# Altium PCB Face PCB.PcbDoc
Units mil, origin at the board's own origin, x right, y up, seen from the top; angles counter-clockwise.
Board outline 2000 x 2000 mil, 2 copper layers (Top Layer, Bottom Layer); 25 components, 23 nets, 94 pads, 6 vias.
Unrouted connection lines stored in the file: 1.
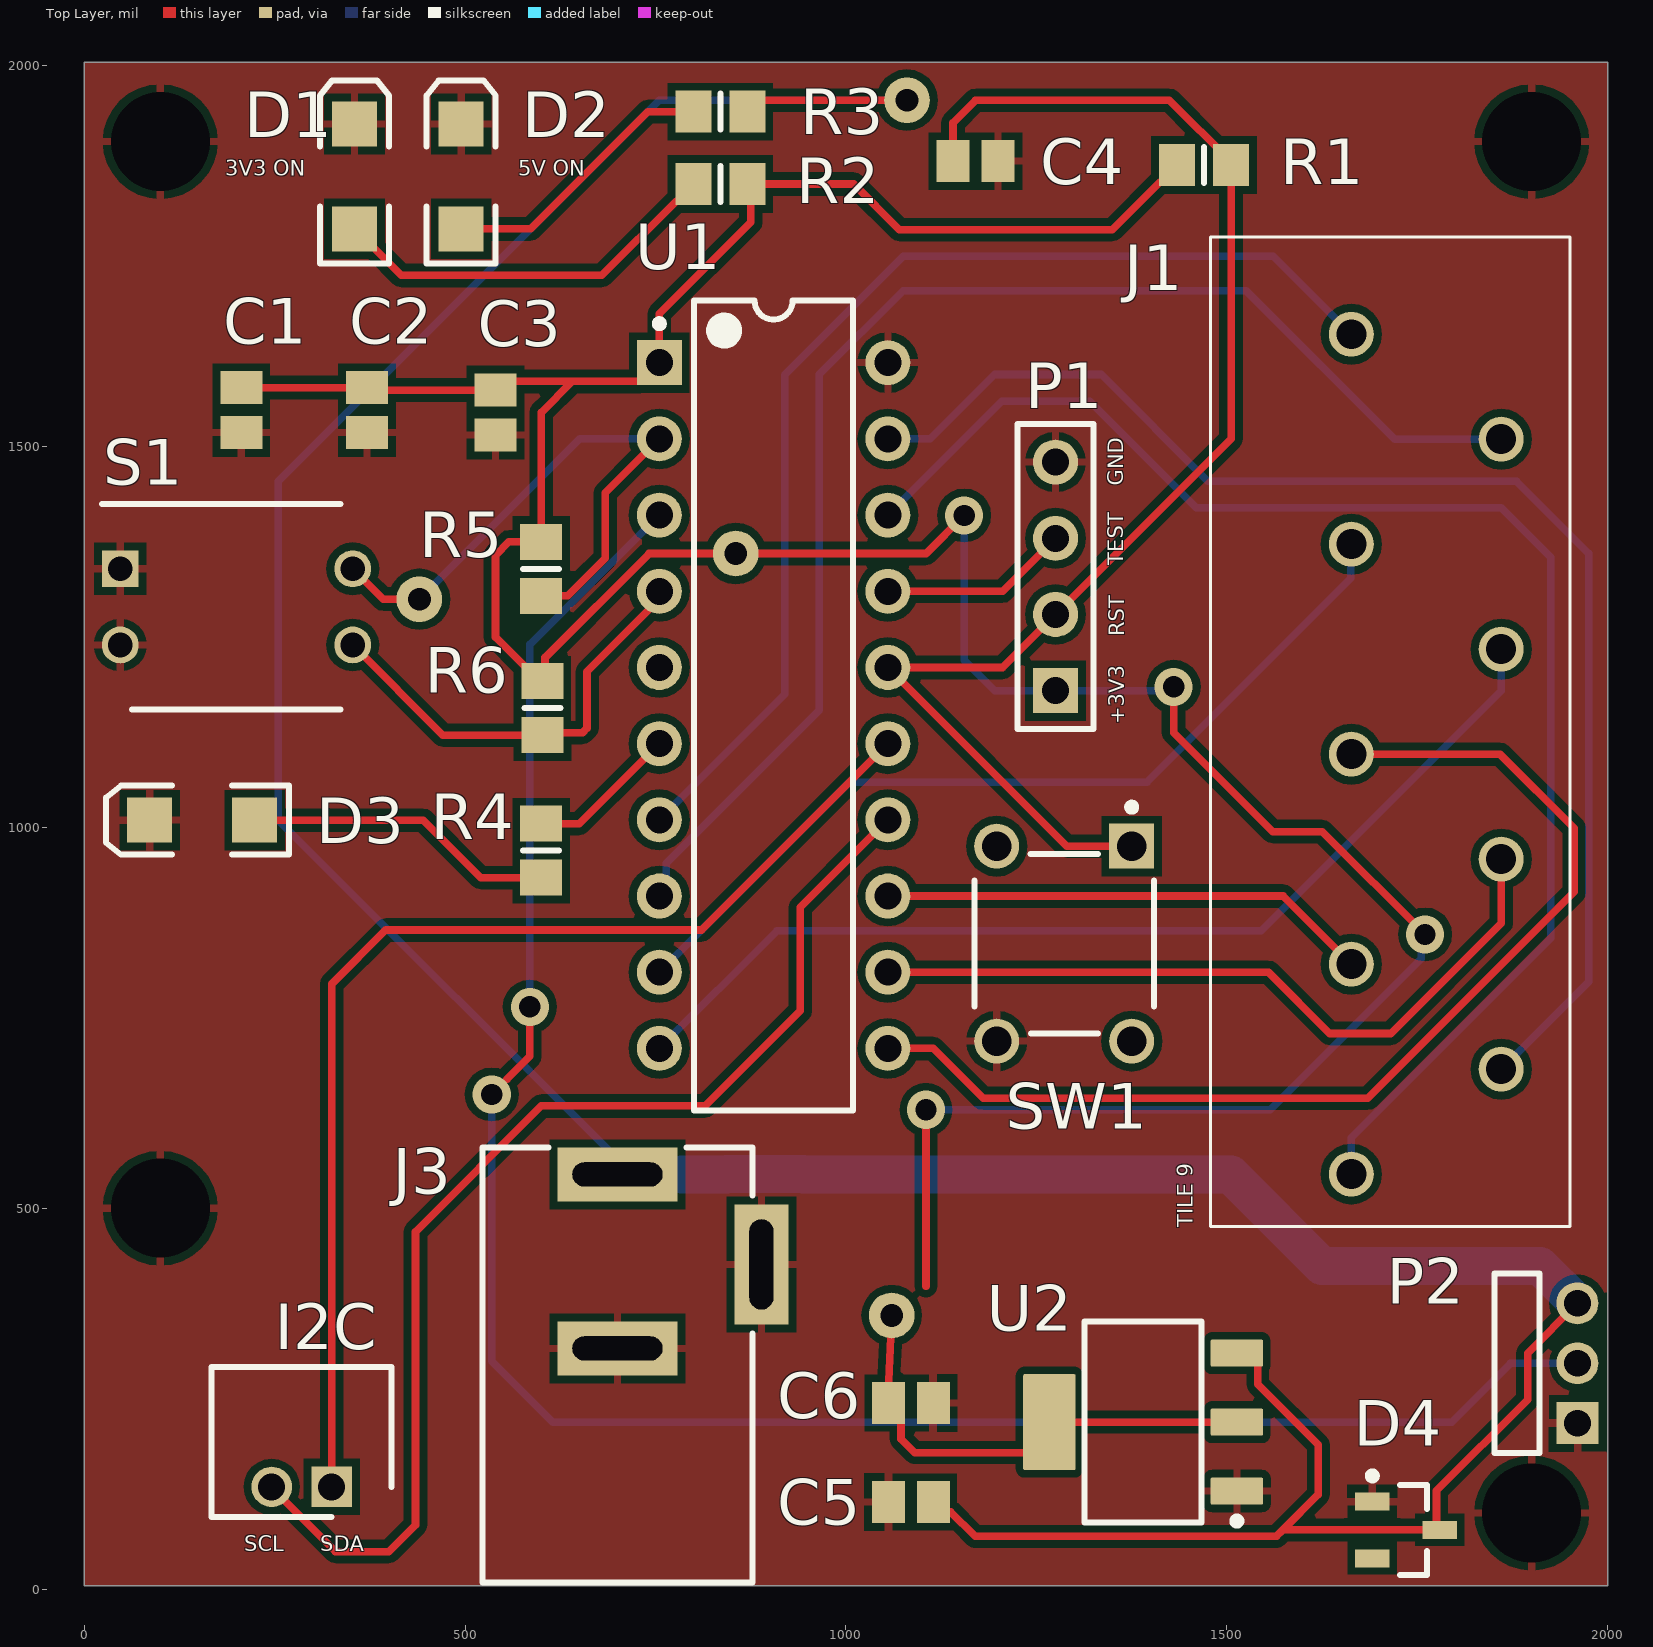
[diagram p0: Top Layer view]
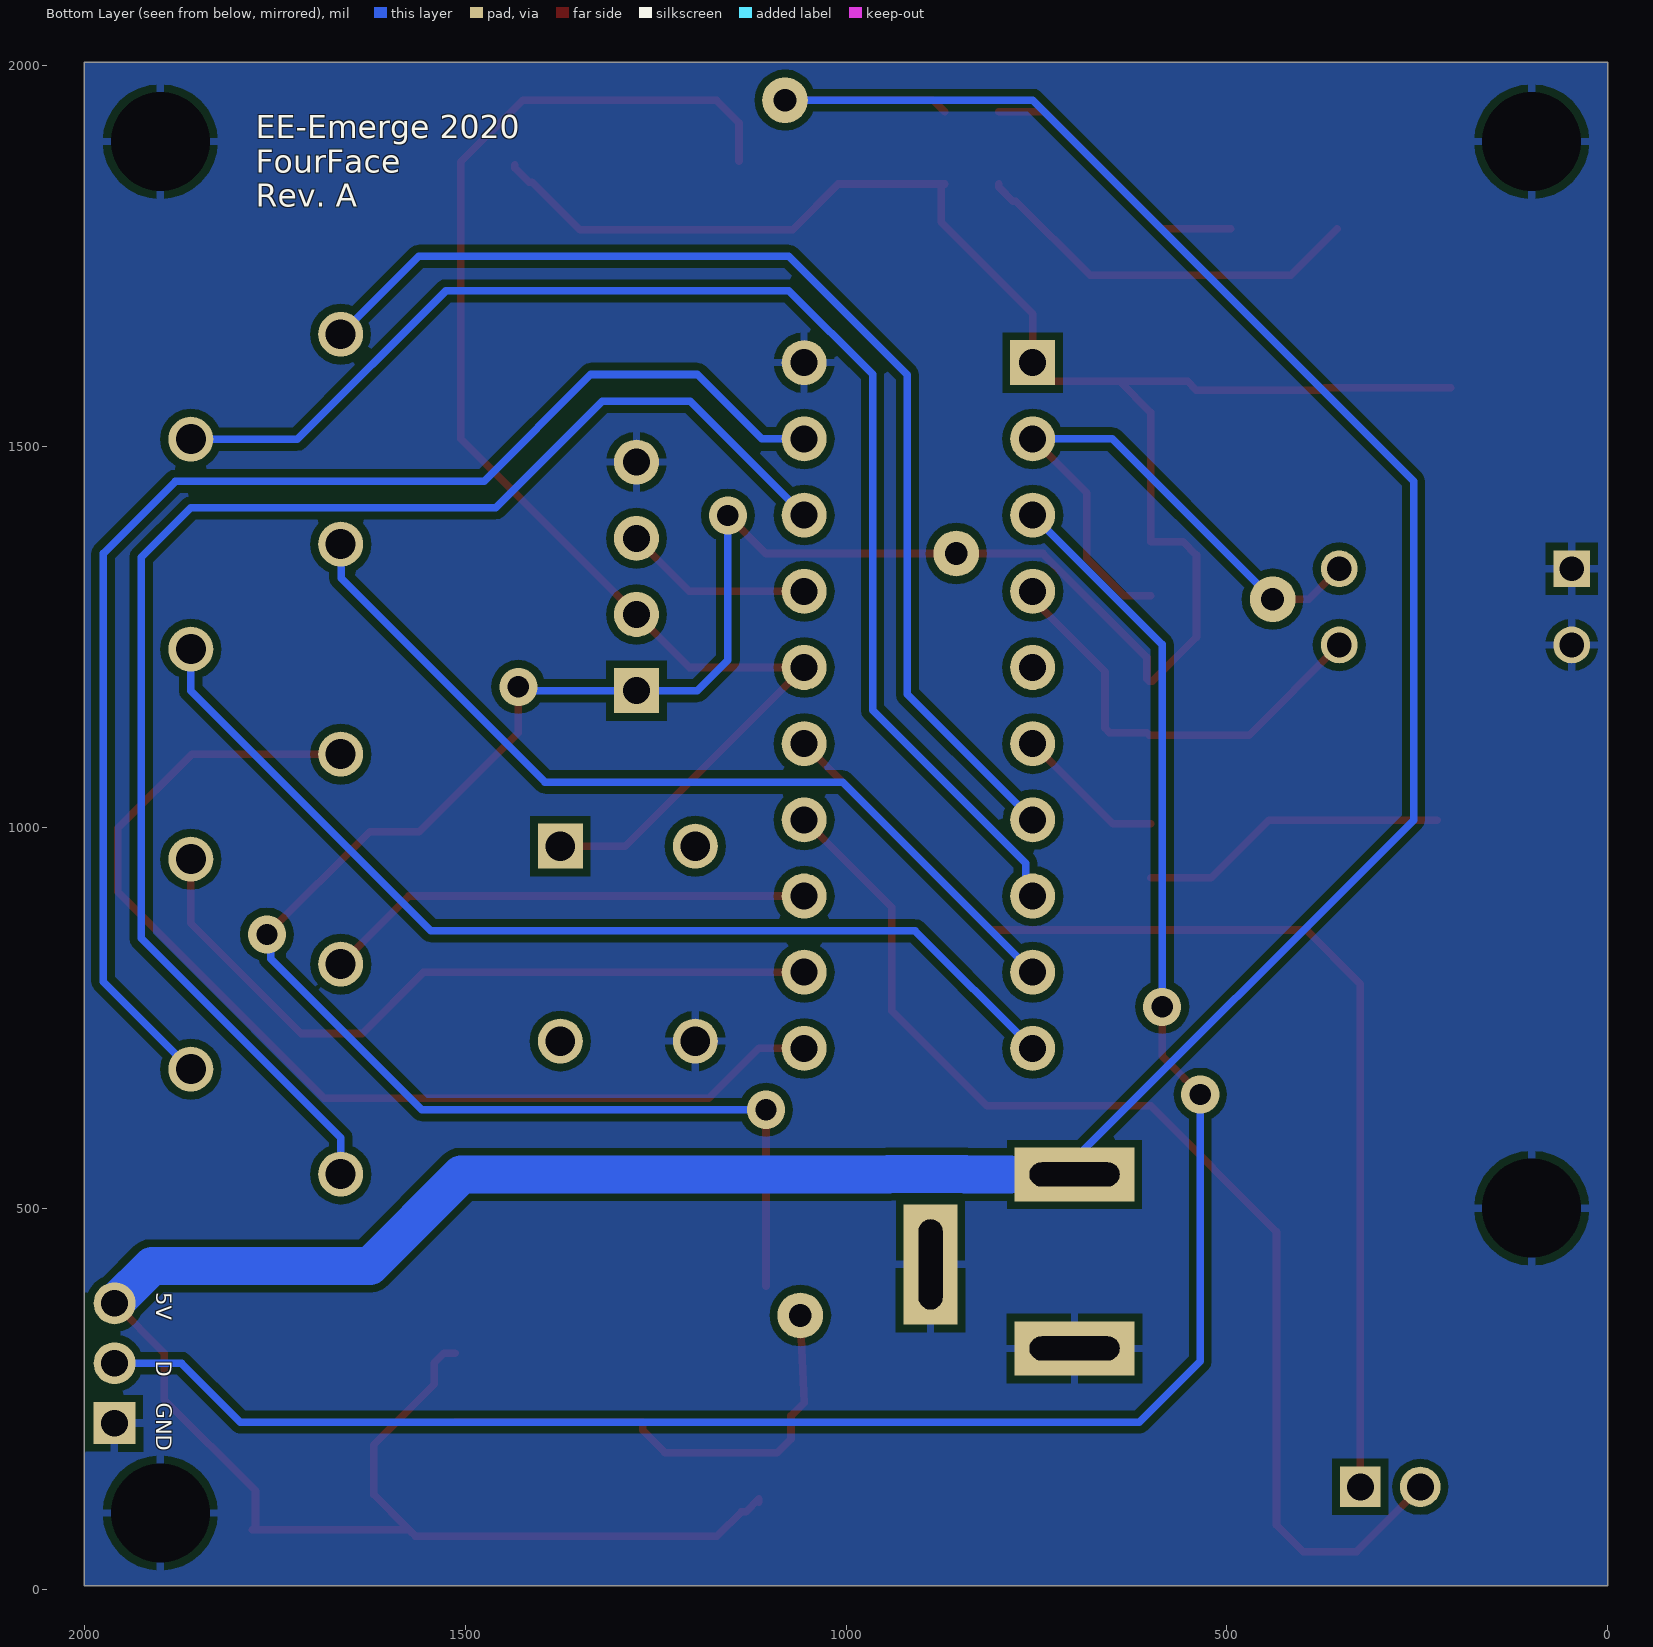
[diagram p1: Bottom Layer view, seen from below]

## Layer stack, top to bottom
Top Solder: solder mask 0.4, Solder Resist, Dk 3.5
Top Layer: signal copper 1.4
Dielectric 1: dielectric 12.6, FR-4, Dk 4.8
Bottom Layer: signal copper 1.4
Bottom Solder: solder mask 0.4, Solder Resist, Dk 3.5

## Board outline
0,2004.29 2000,2004.29 2000,4.29 0,4.29

## Design rules (kind name [scope] priority, off if disabled: settings)
Clearance [All] p1: gap=10 ignorepadtopadclearanceinfootprint=FALSE except(0: Arc-Hole Track-Hole SMDPad-Hole THPad-Hole Via-Hole Fill-Hole Poly-Hole Region-Hole Text-Hole)
PolygonConnect [All] p1: connectstyle=Relief reliefconductorwidth=10 reliefentries=4 polygonreliefangle="90 Angle" airgapwidth=10
RoutingVias [All] p1: holewidth=28 width=50 viastyle="Through Hole" minholewidth=28 minwidth=50 maxholewidth=28 maxwidth=50
SolderMaskExpansion [All] p1: expansion=4
Width [All] p1: maxlimit=50 minlimit=10 preferedwidth=10
30 further rules are at their usual default settings.

## Classes and differential pairs
component class "Face PCB Power & I2C": C5 C6 I2C R5 R6 S1 U2
component class "Face PCB Micro & Status LEDs": 5V C1 C2 C3 C4 D1 D3 D4 J1 J3 P1 P2 R1 R2 R3 R4 SW1 U1

## Components (designator, comment, footprint, x,y, rotation, side; value= is the part's Value field where it differs from the comment)
C1 "Cap2" C0805 206.34,1547.48 r270 top value=10uF
C2 "Cap2" C0805 371.34,1547.48 r270 top value=1uF
C3 "Cap2" C0805 540,1544.29 r270 top value=0.1uF
C4 "Cap2" C0805 1170,1874.29 r0 top value=1000pF
C5 "Cap2" C0805 1085,114.29 r180 top value=100uF
C6 "Cap2" C0805 1085,244.29 r0 top value=1uF
D1 "LED2" 3.2X1.6X1.1 355,1854.29 r90 top
D2 "LED2" 3.2X1.6X1.1 495,1854.29 r90 top
D3 "LED2" 3.2X1.6X1.1 155,1009.29 r180 top
D4 "Diode BAS16" SOT-23_N 1735,77.85 r0 top
I2C "DF3A-2P-2DSA(10)" SHDR2W50P0X200_1X2_600X500X500P 325,134.29 r0 top (schematic designator J2)
J1 "1985263" 1985263 1714.33,1125.43 r270 top
J3 "694106301002" 694106301002 700,294.29 r0 top
P1 "Header 4" HDR1X4 1275,1179.29 r90 top
P2 "TMM-103-01-T-S-RA" SMTC-TMM-103-01-X-S-RA 1960,217.79 r90 top
R1 "Res3" 6-0805_N 1470,1869.29 r0 top value=47K
R2 "Res3" 6-0805_N 835,1844.29 r180 top value=390
R3 "Res3" 6-0805_N 835,1939.29 r180 top value=390
R4 "Res3" 6-0805_N 600,969.29 r270 top value=390
R5 "Res3" 6-0805_N 600,1339.29 r270 top value=4.7K
R6 "Res3" 6-0805_N 601.81,1156.33 r270 top value=4.7K
S1 "210-2MS" DIP775W63P254L655H458Q4N 200,1289.29 r0 top
SW1 "1825910-6" TECO-1825910-6_V 1286.42,847.24 r270 top
U1 "MSP430G2553IN20" N0020A 904.93,1159.76 r0 top
U2 "TLV1117LV33DCYR" DCY0004A_N 1390,219.29 r180 top

## Footprints (in the part's own frame and the unit in brackets; to place one, negate y for a bottom-side part, rotate by r counter-clockwise, add the part's x,y. Pads: shape width x height; smd on the part's side, far side on the other; paste and mask are expansions set on the pad)
3.2X1.6X1.1 [mm]
  rect 1.5x1.5 smd: 1(-1.75,0) 2(1.75,0)
  silkscreen extent -2.9,-1.15 3.2,1.15
6-0805_N [mm]
  rect 1.2x1.4 smd: 1(-0.9,0) 2(0.9,0)
  silkscreen extent 0,-0.6 0,0.6, body extent -1.07,-0.7 1.07,0.7, height 0.7
1985263 [mm]
  round 1.5 hole 1: 1(-13.25,-1.3) 2(-9.75,3.7) 3(-6.25,-1.3) 4(-2.75,3.7) 5(0.75,-1.3) 6(4.25,3.7) 7(7.75,-1.3) 8(11.25,3.7) 9(14.75,-1.3)
  silkscreen extent -16.5,-6 16.5,6, body extent -16.5,-6 16.5,6, height 13
694106301002 [mm] "DC Power Jack Right Angled(6.4)"
  rect 4x1.8 hole 0.8 slot 3 at 0 deg: 1(0,6.35) 2(0,0.55)
  rect 1.8x4 hole 0.8 slot 3 at 90 deg: 3(4.8,3.35)
  silkscreen extent -4.5,-7.25 4.5,7.25, body extent -4.5,-7.25 5,7.25, height 10.75
C0805 [mm]
  rect 1.1x1.4 smd: 1(-0.75,0) 2(0.75,0)
  body extent -1.1,-0.72 1.1,0.72, height 1.4
DCY0004A_N [mm] "SOT223, 4-Leads, Body 6.7x3.7mm, Pitch 2.3mm, IPC Medium Density"
  rrect11% 1.75x0.9 smd: 1(-3.125,2.3) 2(-3.125,0) 3(-3.125,-2.3)
  rrect6% 1.75x3.2 smd: 4(3.125,0)
  silkscreen extent -3.25,-3.35 1.95,3.42, body extent -3.5,-3.25 3.5,3.25, height 1.62
DIP775W63P254L655H458Q4N [mm]
  rect 1.23x1.23 hole 0.83: 1(-3.875,1.27)
  round 1.23 hole 0.83: 2(-3.875,-1.27) 3(3.875,-1.27) 4(3.875,1.27)
  silkscreen extent -4.49,-3.42 3.47,3.42, body extent -4.03,-3.27 4.03,3.27, height 4.58
HDR1X4 [mm] "Connector; Header; 4 Position"
  rect 1.5x1.5 hole 0.9: 1(0,0)
  round 1.5 hole 0.9: 2(2.54,0) 3(5.08,0) 4(7.62,0)
  silkscreen extent -1.27,-1.27 8.89,1.27
N0020A [mm]
  rect 1.5x1.5 hole 0.9: 1(-3.81,11.43)
  round 1.5 hole 0.9: 2(-3.81,8.89) 3(-3.81,6.35) 4(-3.81,3.81) 5(-3.81,1.27) 6(-3.81,-1.27) 7(-3.81,-3.81) 8(-3.81,-6.35) 9(-3.81,-8.89) 10(-3.81,-11.43) 11(3.81,-11.43) 12(3.81,-8.89) 13(3.81,-6.35) 14(3.81,-3.81) 15(3.81,-1.27) 16(3.81,1.27) 17(3.81,3.81) 18(3.81,6.35) 19(3.81,8.89) 20(3.81,11.43)
  silkscreen extent -3.93,-13.5 2.65,13.5, body extent -3.95,-13.45 3.95,13.45, height 5.08
SHDR2W50P0X200_1X2_600X500X500P [mm]
  rect 1.35x1.35 hole 0.9: 1(0,0)
  round 1.35 hole 0.9: 2(-2,0)
  silkscreen extent -4,-1 2,4
SMTC-TMM-103-01-X-S-RA [mm]
  rect 1.4x1.4 hole 0.89: 1(0,0)
  round 1.4 hole 0.89: 2(2,0) 3(4,0)
  silkscreen extent -1,1.27 5,2.77, body extent -1,-0.25 5,5.97, height 1.98
SOT-23_N [mm] "SOT23, 3-Leads, Body 2.9x1.3mm, Pitch 0.95mm, Lead Span 2.5mm, IPC Medium Density"
  rect 1.15x0.6 smd: 1(-1.125,0.95) 2(-1.125,-0.95) 3(1.125,0)
  silkscreen extent -1.25,-1.5 0.7,1.92, body extent -0.7,-1.5 0.7,1.5, height 1.1
TECO-1825910-6_V [mm] "Switch, 4-Leads, Body 5.99x5.99mm"
  rect 1.5x1.5 hole 0.99: 1(-3.25,2.25)
  round 1.5 hole 0.99: 2(3.25,2.25) 3(-3.25,-2.25) 4(3.25,-2.25)
  silkscreen extent -4.67,-2.99 2.99,3, body extent -3,-2.99 2.99,3, height 5

## Part data
C1 C3 C4 C5 C6: "Capacitor", PackageDescription="Capacitor; 2 Leads", PackageReference=CAPR5-4X5, Published=23-Sep-2002, Publisher="Altium Limited"
C2: library part Cap2_4, "Capacitor", PackageDescription="Capacitor; 2 Leads", PackageReference=CAPR5-4X5, Published=23-Sep-2002, Publisher="Altium Limited"
D1 D2 D3: "Typical RED, GREEN, YELLOW, AMBER GaAs LED", LatestRevisionDate=17-Jul-2002, LatestRevisionNote="Re-released for DXP Platform.", PackageDescription="SM LED; 2 Flat Leads", PackageReference=3.2X1.6X1.1, PackageVersion=Feb-2002, Published=8-Jun-2000, Publisher="Altium Limited"
D4: "Silicon Switching Diode for High-Speed Switching", ComponentLink1Description="Manufacturer Link", ComponentLink1URL=http://www.infineon.com/, ComponentLink2Description=Datasheet, ComponentLink2URL=http://www.infineon.com/upload/Document/cmc_upload/documents/012/5331/bas16series.pdf, DatasheetVersion=Oct-1999, LatestRevisionDate=29-May-2009, LatestRevisionNote="IPC-7351 Footprint Added.", Note="Pin 2 is not connected and not drawn.", PackageDescription="3-Pin SOT-23 Package 0.95 mm Pitch, 2.5 mm Lead Span", PackageReference=SOT-23, PackageVersion=Sep-2001, Published=21-Mar-2003, Publisher="Altium Limited"
I2C: "Connector", Manufacturer_Name=Hirose, Mouser Part Number=798-DF3A-2P-2DSA10, Datasheet Link=https://componentsearchengine.com/Datasheets/1/DF3A-2P-2DSA(10).pdf, Height=5mm, Manufacturer_Part_Number=DF3A-2P-2DSA(10), Mouser Price/Stock=https://www.mouser.com/Search/Refine.aspx?Keyword=798-DF3A-2P-2DSA10
J1: "Connector", Manufacturer_Name="Phoenix Contact", Mouser Part Number=651-1985263, RS Part Number=6482559, Allied_Number=70055076, Allied Price/Stock=https://www.alliedelec.com/phoenix-contact-1985263/70055076/, Datasheet Link=https://www.phoenixcontact.com/online/portal/us?uri=pxc-oc-itemdetail:pid=1985263&library=usen&tab=1, Height=13mm, Manufacturer_Part_Number=1985263, Mouser Price/Stock=https://www.mouser.com/Search/Refine.aspx?Keyword=651-1985263, RS Price/Stock=http://uk.rs-online.com/web/p/products/6482559
J3: library part CMP-1502-00188-1, "DC Power Jack Connector WR-DC, Male, Right Angled, THT, 5 A, 24 V", Manufacturer="Wurth Elektronik", Operating Temperature=-40to85degC, Rated Current=5A, Working Voltage=24V, Datasheet URL=http://katalog.we-online.de/em/datasheet/6941xx301002.pdf, Gender=Male, Manufacturer URL=http://www.we-online.de, Mounting Technology=THT, Opening Diameter=6.4mm, Orientation=RightAngled, Package Reference=694106301002, Packaging=Bag, Part Number=694106301002, Plug Inner Diameter=2.05mm, Plug Outer Diameter=5.5mm, Publisher=WurthElektronik
P1: "Header, 4-Pin", LatestRevisionDate=17-Jul-2002, LatestRevisionNote="Re-released for DXP Platform.", Publisher="Altium Limited"
P2: library part CMP-1029-00176-1, "Low Profile Through-Hole Header, Right Angle, -55 to 105 degC, 2 mm Pitch, 3-Pin, Male, RoHS", Manufacturer=Samtec, Temperature Range="-55 to 105 degC", ComponentLink1Description="Manufacturer URL", ComponentLink1URL=http://www.samtec.com, ComponentLink2Description=Datasheet, ComponentLink2URL=http://d2a072wq521u33.cloudfront.net/catalog_english//TMM_TH.PDF, ComponentLink3Description="Package Specification", ComponentLink3URL=http://www.samtec.com/documents/webfiles/cpdf/TMM-1XX-XX-XX-X-RA-XXX-MKT.pdf, DatasheetVersion=F-214, Manufacturer 1=Samtec, Manufacturer Part Number 1=TMM-103-01-T-S-RA, Mounting Technology=Through-hole, Orientation="Right Angle", PackageDescription="2 mm Terminal Strip Assembly (R/A)", PackageReference=TMM-103-01-X-S-RA, PackageVersion="V, 3/2013", PartNumber=TMM-103-01-T-S-RA, Pitch="2 mm", RoHS=True
R1 R2 R3 R4 R5 R6: "Resistor", LatestRevisionDate=29-May-2009, LatestRevisionNote="IPC-7351 Footprint Added.", PackageDescription="Chip Resistor", PackageReference=J1-0603, Published=8-Jun-2000, Publisher="Altium Limited"
S1: "Switch", Manufacturer_Name=CTS, Mouser Part Number=774-2102MS, RS Part Number=1774261, Datasheet Link=https://componentsearchengine.com/Datasheets/1/210-2MS.pdf, Height=4.58mm, Manufacturer_Part_Number=210-2MS, Mouser Price/Stock=https://www.mouser.com/Search/Refine.aspx?Keyword=774-2102MS, RS Price/Stock=http://uk.rs-online.com/web/p/products/1774261
SW1: library part CMP-1684-00021-1, "Tact Switch, SPST-NO, 0.05 A, -35 to 85 degC, 4-Pin THD, RoHS, Bulk", Actuator Color=Black, Contact Rating @ Voltage=0.05A@24VDC, Dielectric Strength=500VAC, Manufacturer="TE Connectivity", Maximum AC Voltage Rating=N/A, Maximum Contact Resistance=100mOhm, Maximum DC Voltage Rating=24V, Minimum Insulation Resistance=100MOhm, Operating Temperature=-35to85C, Package Description="4-Pin Through Hole Device, Body 5.99 x 5.99 mm, Pitch 6.5 mm", Package Reference=THD, Actuator Length=1.4mm, Actuator Material=PolybutyleneTerephthalate, Actuator Style=RoundButton, Base Material=N/A, Body Orientation=Straight, Bushing Type=Unthreaded, Contact Material=CopperAlloy, Contact Plating=Silver, Datasheet URL=http://www.te.com/commerce/DocumentDelivery/DDEController?Action=showdoc&DocId=Customer+Drawing%7F1825910%7FC9%7Fpdf%7FEnglish%7FENG_CD_1825910_C9.pdf%7F1825910-6, Datasheet Version="Rev. C9", Dimension=5.99x5mm, Electrical Life=100000Cycles, Family=1825910, Function=MomentaryContact, Housing Material=N/A, Illumination=N/R, Manufacturer URL=http://www.te.com, Mechanical Life=100000Cycles, Mounting=ThroughHole, Packaging=N/A, Part No=1825910-6, Pole Throw Configuration=SPST, Product Weight=N/A, RoHS=Yes, Seal Description=N/A, Seal Location=N/A, Switch Configuration=OFF(ON), Terminal Type=PCPins, Thread Size=N/R
U1: library part CMP-0365-00184-2, "16 MHz Mixed Signal Microcontroller with 16 KB Flash, 512 B SRAM and 24 GPIOs, -40 to 85 degC, 20-pin DIP (N), Pb-Free (RoHS)", Frequency(MHz)=16, Manufacturer="Texas Instruments", Temp Sensor=Yes, ADC="10-bit SAR", ADC Channels=8, Brown Out Reset=Yes, Cap touch I/O=Yes, Code_JEDEC=MS-001, Comparators=Yes, ComponentLink1Description="Manufacturer URL", ComponentLink1URL=http://www.ti.com/, ComponentLink2Description=Datasheet, ComponentLink2URL=http://www.ti.com/general/docs/lit/getliterature.tsp?genericPartNumber=MSP430G2553&fileType=pdf, ComponentLink3Description="Package Specification", ComponentLink3URL=http://www.ti.com/litv/pdf/mpds177g, DatasheetVersion=SLAS735G, Eco-Plan="Pb-Free (RoHS)", Flash(KB)=16, GPIO=24, Manufacturer 1="Texas Instruments", Manufacturer Part Number 1=MSP430G2553IN20, Mounting Technology="Through Hole", PackageDescription="20-Pin Plastic In-Line, Body 25.40 x 6.35 mm, Pitch 2.54 mm", PackageReference=N0020A, PackageVersion=4040049/E, PartNumber=MSP430G2553IN20, SRAM(B)=512, SubFamily="Value Line", Timers - 16-bit=2, USCI_A (UART/LIN/IrDA/SPI)=1, USCI_B (I2C & SPI)=1, Watchdog=Yes
U2: library part CMP-0395-00503-2, "Single Output LDO, 1 A, Fixed 3.3 V Output, 2 to 5.5 V Input, 4-pin SOT-223 (DCY), -40 to 125 degC, Green (RoHS & no Sb/Br)", Manufacturer="Texas Instruments", Accuracy(%)=2, Code_JEDEC=TO-261, ComponentLink1Description="Manufacturer URL", ComponentLink1URL=http://www.ti.com/, ComponentLink2Description=Datasheet, ComponentLink2URL=http://www.ti.com/general/docs/lit/getliterature.tsp?genericPartNumber=TLV1117LV33&fileType=pdf, ComponentLink3Description="Package Specification", ComponentLink3URL=http://www.ti.com/litv/pdf/mpds094a, DatasheetVersion=SBVS160A, Eco-Plan="Green (RoHS & no Sb/Br)", Fixed Output Options(V)=3.3, Iout(Max)(A)=1, Iq(Typ)(mA)=0.05, Mounting Technology="Surface Mount", PackageDescription="4-Pin Plastic Small Outline, Body 3.5 x 6.5 mm, Pitch 2.3 mm", PackageReference=DCY0004A, PackageVersion=4202506/B, PartNumber=TLV1117LV33DCYR, SubFamily="Single Channel LDO", Vdo(Typ)(mV)=1200, Vin(Max)(V)=5.5, Vin(Min)(V)=2, Vout Adj(Max)(V)=3.3, Vout Adj(Min)(V)=3.3

## Free pads (board coordinates)
  round 60 hole 130: 8(100,500) 8(100,1900) 8(1900,100) 8(1900,1900)
  round 60 hole 30: 9(440,1299.29) 12(1080,1954.29) 13(1060,359.29) 14(855.29,1359.29)

## Via types
v1: diameter 50, hole 28, Top Layer to Bottom Layer, 6 vias

## Nets (pads, with @x,y where several pads share a name; then routed paths per layer and width w, separated by ;. In a path a pad name is that pad's centre, name@x,y a point inside that pad or via, vN(x,y) a via of type N, cw(c..) or ccw(c..) an arc to the next point about the centre after c; other vN are vias at no path point)
+3V3: C1.1 C2.1 C3.1 C6.1 P1.1 pad.13 pad.14 R1.1 R2.1 R5.1 R6.1 U1.1 U2.2 U2.4 | length 5217.5
  Top Layer w10: C1.1 C2.1 374.53,1573.82 C3.1 551.42,1585.24 640.91,1585.24 ; pad.14@840,1359.29 741.49,1359.29 605,1222.8 605,1194.95 R6.1 597.87,1191.76 540,1249.63 540,1357.28 557.44,1374.72 R5.1 600,1544.32 640.91,1585.24 ; pad.14 1105,1359.29 v1(1155,1409.29) ; pad.13@1060,372.82 pad.13 1055,244.76 C6.1 1072.13,227.64 1072.13,197.17 1090,179.29 1237.52,179.29 1266.97,208.74 U2.4 U2.2 ; 1105,397.82 v1(1105,629.29) ; v1(1430,1184.29) 1430,1124.29 1560,994.29 1625,994.29 v1(1760,859.29) ; R1.1 1434.57,1865.35 1415.95,1846.73 1412.01,1846.73 1349.57,1784.29 1070,1784.29 1010,1844.29 R2.1 875,1839.72 875,1794.29 754.93,1674.23 U1.1 730.41,1585.24 640.91,1585.24
  Bottom Layer w10: v1(1105,629.29) 1556.72,629.29 1755,827.58 1755,854.29 v1(1760,859.29) ; v1(1155,1409.29) 1155,1219.29 1195,1179.29 P1.1 1405,1179.29
+5V: C5.1 D4.3 J3.1 P2.3 pad.12 R3.1 U2.3 | length 5033.8
  Top Layer w10: R3.1 885.43,1954.29 pad.12 ; C5.1 1114.53,118.39 1131.18,101.73 1137.09,101.73 1169.53,69.29 1565,69.29 1573.56,77.85 ; U2.3 1527.82,309.84 1540.53,297.13 1540.53,268.76 1620,189.29 1620,124.29 1573.56,77.85 ; P2.3 1894.58,309.84 1894.58,248.87 1775,129.29 1775,82.15 D4.3 1573.56,77.85
  Bottom Layer w10: 785,544.29 720,544.29 255,1009.29 255,1454.29 755,1954.29 pad.12
  Bottom Layer w50: 785,544.29 843.42,544.29 844.05,544.92 943.91,544.92 944.54,544.29 1505,544.29 1625,424.29 1910.97,424.29 P2.3
A0: pad.9 R5.2 S1.4 U1.2 | length 771.5
  Top Layer w10: S1.4 392.56,1299.29 pad.9@415,1299.29 ; R5.2 634.57,1303.86 684.05,1353.35 684.05,1438.88 U1.2
  Bottom Layer w10: pad.9 650.47,1509.76 U1.2
A1: R6.2 S1.3 U1.4 | length 579.3
  Top Layer w10: S1.3 470.96,1120.9 R6.2 605.2,1124.29 654.14,1124.29 660,1130.15 660,1204.29 754.93,1299.23 U1.4
GND: C1.2 C2.2 C3.2 C4.2 C5.2 C6.2 D1.2 D2.2 D3.2 D4.1 J3.2 J3.3 P1.4 P2.1 pad.8 S1.1 S1.2 SW1.4 U1.20 U2.1
LED: R4.1 U1.6 | length 198.4
  Top Layer w10: R4.1 649.89,1004.72 U1.6
NetD1_1: D1.1 R2.2 | length 521.9
  Top Layer w10: D1.1 416.1,1724.29 679.57,1724.29 777.01,1821.73 780.95,1821.73 799.57,1840.35 R2.2
NetD2_1: D2.1 R3.2 | length 368.3
  Top Layer w10: D2.1 586.1,1785.39 740,1939.29 R3.2
NetD3_1: D3.1 R4.2 | length 407.3
  Top Layer w10: D3.1 445,1009.29 520.43,933.86 R4.2
RST: C4.1 P1.2 R1.2 SW1.1 U1.16 | length 1816.7
  Top Layer w10: C4.1 1140.47,1924.76 1170,1954.29 1424.37,1954.29 1505.43,1873.23 R1.2 1505.43,1509.72 P1.2 1205.47,1209.76 U1.16 1289.5,975.2 SW1.1
SCL: I2C.2 U1.14 | length 1547.4
  Top Layer w10: I2C.2 246.26,133.03 330,49.29 400,49.29 435,84.29 435,469.29 600,634.29 815,634.29 940,759.29 940,894.83 U1.14
SDA: I2C.1 U1.15 | length 1520.6
  Top Layer w10: I2C.1 325,794.29 395.95,865.24 810.41,865.24 U1.15
STRIP: P2.2 U1.3 | length 2638.4
  Top Layer w10: 555,669.29 585,699.29 v1(585,764.29)
  Bottom Layer w10: v1(535,649.29) 535,299.29 615,219.29 1795,219.29 1872.23,296.53 P2.2 ; 585,789.29 585,1239.83 U1.3
T1: J1.1 U1.7 | length 1502.6
  Bottom Layer w10: U1.7 919.66,1174.49 919.66,1593.95 1075,1749.29 1560.94,1749.29 J1.1
T2: J1.2 U1.8 | length 1792.9
  Bottom Layer w10: U1.8 764.32,919.15 764.32,953.02 965,1153.7 965,1594.29 1075,1704.29 1525,1704.29 1720,1509.29 J1.2
T3: J1.3 U1.9 | length 1166.7
  Bottom Layer w10: U1.9 1004.46,1059.29 1395,1059.29 1662.68,1326.97 1662.68,1371.02 J1.3
T4: J1.4 U1.10 | length 1354
  Bottom Layer w10: U1.10 909.46,864.29 1545,864.29 1860,1179.29 J1.4
T5: J1.5 U1.11 | length 1456.6
  Top Layer w10: U1.11 1114.53,709.76 1180,644.29 1685,644.29 1955.86,915.15 1955.86,998.43 1858.39,1095.91 J1.5
T6: J1.6 U1.12 | length 982.3
  Top Layer w10: U1.12 1554.53,809.76 1635,729.29 1715,729.29 1860,874.29 J1.6
T7: J1.7 U1.13 | length 645.3
  Top Layer w10: U1.13 1573.7,909.76 J1.7
T8: J1.8 U1.19 | length 1776.8
  Bottom Layer w10: U1.19 1110.47,1509.76 1195,1594.29 1335,1594.29 1475,1454.29 1880,1454.29 1975,1359.29 1975,797.52 J1.8
T9: J1.9 U1.18 | length 1934.9
  Bottom Layer w10: U1.18 1204.46,1559.29 1320,1559.29 1460,1419.29 1860,1419.29 1925,1354.29 1925,854.29 1663.15,592.44 J1.9
TEST: P1.3 U1.17 | length 248.9
  Top Layer w10: U1.17 1205.47,1309.76 P1.3
pads on no net: D4.2 SW1.2 SW1.3 U1.5

## Polygon pours and split planes (outlines as drawn)
GND on Bottom Layer "Bottom Layer-GND" (solid, pour order 0): 0,2004.29 0,4.29 2000,4.29 2000,2004.29
GND on Top Layer "Top Layer-GND" (solid, pour order 4): 2000,2004.29 2000,4.29 0,4.29 0,2004.29

## Silkscreen, mask and mechanical layers (free items; w line width, h text height)
Top Overlay:
  text "3V3 ON" at 185,1855 h20
  text "5V ON" at 570,1855 h20
  text "GND" at 1364,1448 h20 r90
  text "TEST" at 1364,1344 h20 r90
  text "RST" at 1365,1251 h20 r90
  text "+3V3" at 1365,1135 h20 r90
  text "TILE 9" at 1455,475 h20 r90
  text "SCL" at 210,50 h20
  text "SDA" at 310,50 h20
Bottom Overlay:
  text "EE-Emerge 2020 / FourFace / Rev. A" at 1775,1814.29 h30
  text "5V" at 1905,390 h20 r90
  text "D" at 1905,300 h20 r90
  text "GND" at 1905,245 h20 r90